# Altium PCB LCD Ohmmeter.PcbDoc
Units mil, origin at the board's own origin, x right, y up, seen from the top; angles counter-clockwise.
Board outline 6000 x 4000 mil, 2 copper layers (Top Layer, Bottom Layer); 10 components, 13 nets, 78 pads, 0 vias.
Unrouted connection lines stored in the file: 31.
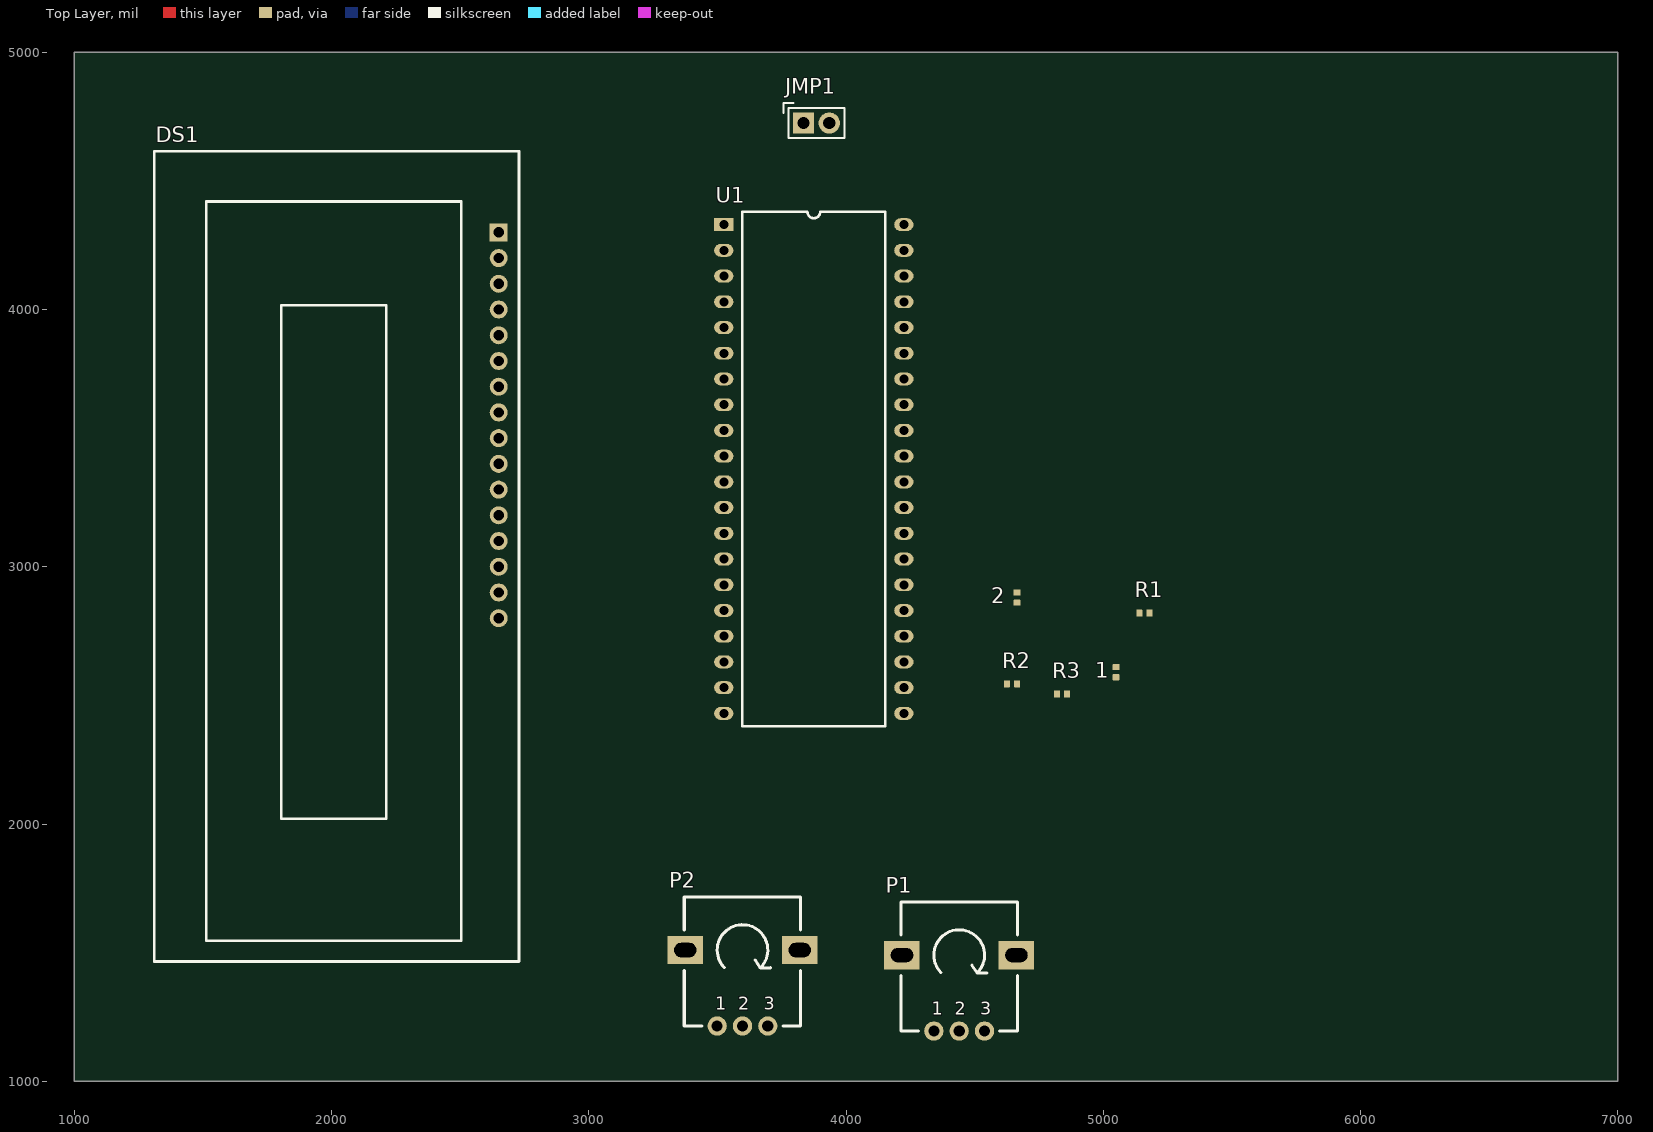
[diagram p0: Top Layer view]
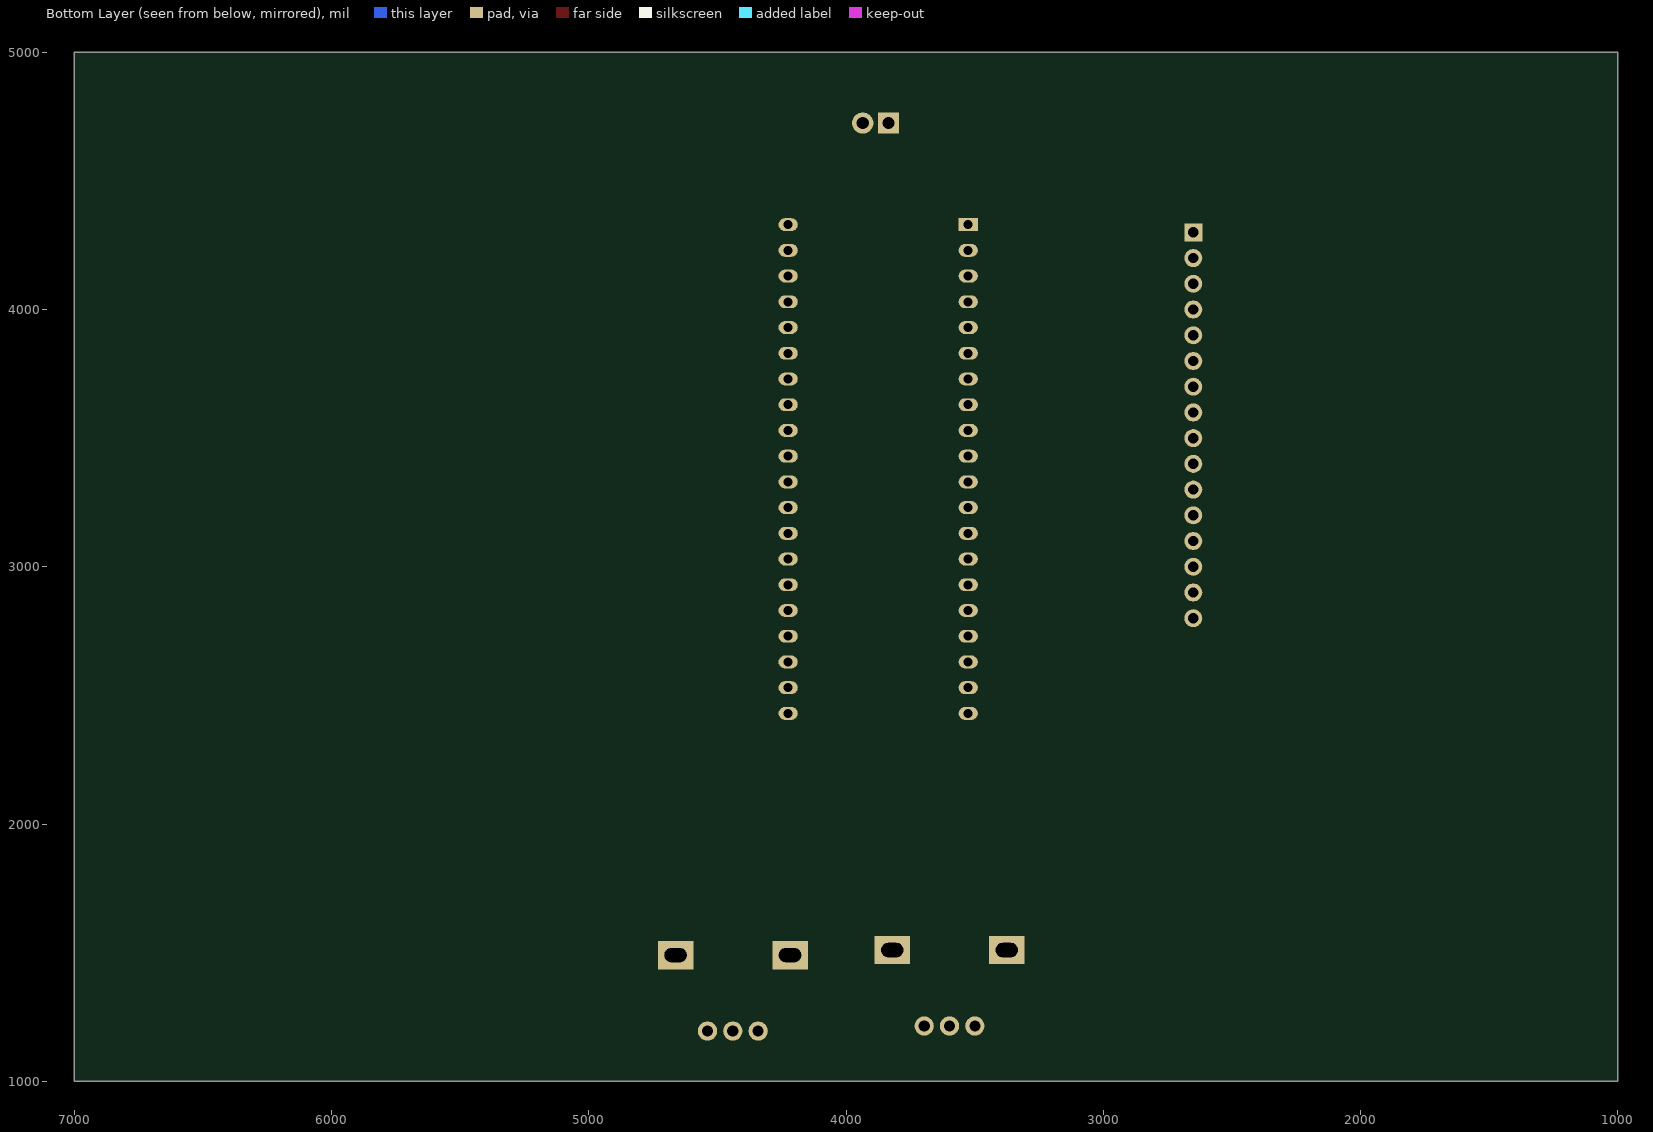
[diagram p1: Bottom Layer view, seen from below]

## Layer stack, top to bottom
Top Solder: solder mask 0.4, Solder Resist, Dk 3.5
Top Layer: signal copper 1.4
Dielectric 1: dielectric 12.6, FR-4, Dk 4.8
Bottom Layer: signal copper 1.4
Bottom Solder: solder mask 0.4, Solder Resist, Dk 3.5

## Board outline
1000,1000 7000,1000 7000,5000 1000,5000

## Design rules (kind name [scope] priority, off if disabled: settings)
Clearance [All] p1: gap=10 ignorepadtopadclearanceinfootprint=FALSE
PolygonConnect [All] p1: connectstyle=Relief reliefconductorwidth=10 reliefentries=4 polygonreliefangle="90 Angle" airgapwidth=10
RoutingVias [All] p1: holewidth=28 width=50 viastyle="Through Hole" minholewidth=28 minwidth=50 maxholewidth=28 maxwidth=50
SolderMaskExpansion [All] p1: expansion=4 istentingtop=FALSE
SupplyNets "Schematic Supply Nets" [InNet('GND')] p1: voltage=0.000
Width [All] p1: maxlimit=10 minlimit=10 preferedwidth=10
30 further rules are at their usual default settings.

## Components (designator, comment, footprint, x,y, rotation, side; value= is the part's Value field where it differs from the comment)
1 "C0402" CAP_0402 5050,2590.31 r90 top
2 "C0402" CAP_0402 4665,2880 r90 top
DS1 "LCD 44780" "OLED 16x2" 2650,4300 r270 top
JMP1 "Jumper" JMP2_TH 3885,4725 r0 top
P1 "10k" RK09L1140A5L 4440,1195 r0 top
P2 "10k" RK09L1140A5L 3597.56,1214.72 r0 top
R1 "220R" RES_0402 5160.31,2820 r0 top
R2 "37K" RES_0402 4645.31,2545 r0 top
R3 "Rx" RES_0402 4840,2505.31 r0 top
U1 "Raspberry Pi Pico" "Raspberry Pi Pico" 3525,4330 r0 top

## Footprints (in the part's own frame and the unit in brackets; to place one, negate y for a bottom-side part, rotate by r counter-clockwise, add the part's x,y. Pads: shape width x height; smd on the part's side, far side on the other; paste and mask are expansions set on the pad)
CAP_0402 [mm]
  rrect25% 0.6x0.7 smd: 1(-0.5,0) 2(0.5,0)
  body extent -0.5,-0.26 0.5,0.26, height 0.37
JMP2_TH [mm]
  rect 2.1x2.1 hole 1.2: 1(-1.27,0)
  round 2.1 hole 1.2: 2(1.27,0)
  silkscreen extent -3.25,-1.5 2.75,2
"OLED 16x2" [mil]
  rect 70x70 hole 40: 1(0,0)
  round 70 hole 40: 2(100,0) 3(200,0) 4(300,0) 5(400,0) 6(500,0) 7(600,0) 8(700,0) 9(800,0) 10(900,0) 11(1000,0) 12(1100,0) 13(1200,0) 14(1300,0) 15(1400,0) 16(1500,0)
  silkscreen extent -315,-1339 2835,79
"Raspberry Pi Pico" [mil]
  rect 75x50 hole 35: 1(0,0)
  oval 75x50 hole 35: 2(0,-100) 3(0,-200) 4(0,-300) 5(0,-400) 6(0,-500) 7(0,-600) 8(0,-700) 9(0,-800) 10(0,-900) 11(0,-1000) 12(0,-1100) 13(0,-1200) 14(0,-1300) 15(0,-1400) 16(0,-1500) 17(0,-1600) 18(0,-1700) 19(0,-1800) 20(0,-1900) 21(700,-1900) 22(700,-1800) 23(700,-1700) 24(700,-1600) 25(700,-1500) 26(700,-1400) 27(700,-1300) 28(700,-1200) 29(700,-1100) 30(700,-1000) 31(700,-900) 32(700,-800) 33(700,-700) 34(700,-600) 35(700,-500) 36(700,-400) 37(700,-300) 38(700,-200) 39(700,-100) 40(700,0)
  silkscreen extent 72,-1950 628,50
RES_0402 [mm]
  rrect25% 0.6x0.7 smd: 1(-0.5,0) 2(0.5,0)
  body extent -0.5,-0.25 0.5,0.25, height 0.3
RK09L1140A5L [mm]
  round 1.9 hole 1.1: 1(-2.5,0) 2(0,0) 3(2.5,0)
  rect 3.5x2.8 hole 1.4 slot 2.2 at 0 deg: MH(-5.65,7.5) MH(5.65,7.5)
  silkscreen extent -5.75,0 5.75,12.75, body extent -6.05,-0.15 6.05,12.35, height 25.01

## Part data
1 2: library part CAP_0402, "Capacitor SMD 0402"
JMP1: library part JMP2_TH, "Jumper 2 Pins Through-Hole DO NOT PLACE"
P1 P2: library part RK09L1140A5L, "Potentiometer Vertical 10k Linear Taper (1B) THT PCB-Mount D-Type 6mm Shaft", Manufacturer="Alps Alpine", Manufacturer Part Number=RK09L1140A5L
R1 R2 R3: library part RES_0402, "Resistor SMD 0402"

## Nets (pads, with @x,y where several pads share a name; then routed paths per layer and width w, separated by ;. In a path a pad name is that pad's centre, name@x,y a point inside that pad or via, vN(x,y) a via of type N, cw(c..) or ccw(c..) an arc to the next point about the centre after c; other vN are vias at no path point)
+3V3: 1.1 P2.3 R2.2 U1.31 U1.35
+5V: DS1.2 R1.2 U1.40
A+: DS1.15 P1.2
ADC_VX: 2.1 R2.1 R3.2 U1.34
D4: DS1.11 U1.14
D5: DS1.12 U1.15
D6: DS1.13 U1.16
D7: DS1.14 U1.17
EN: DS1.6 U1.9
GND: 1.2 2.2 DS1.1 DS1.5 DS1.7 DS1.8 DS1.9 DS1.10 DS1.16 P1.1 P2.1 R3.1 U1.37 U1.38
NetP1_3: P1.3 R1.1
RS: DS1.4 U1.7
VO: DS1.3 P2.2
pads on no net: JMP1.1 JMP1.2 P1.MH P2.MH U1.1 U1.2 U1.3 U1.4 U1.5 U1.6 U1.8 U1.10 U1.11 U1.12 U1.13 U1.18 U1.19 U1.20 U1.21 U1.22 U1.23 U1.24 U1.25 U1.26 U1.27 U1.28 U1.29 U1.30 U1.32 U1.33 U1.36 U1.39

## Text inside footprints (layer, text, board x,y; h text height)
P1: Top Overlay "1" at 4333.38,1258.98 h49.21; Top Overlay "2" at 4423.6,1258.98 h49.21; Top Overlay "3" at 4522.03,1258.98 h49.21; Mechanical 13 "1" at 4335.02,1263.9 h39.37; Mechanical 13 "2" at 4426.88,1263.9 h39.37; Mechanical 13 "3" at 4525.31,1263.9 h39.37
P2: Top Overlay "1" at 3490.93,1278.71 h49.21; Top Overlay "2" at 3581.16,1278.71 h49.21; Top Overlay "3" at 3679.59,1278.71 h49.21; Mechanical 13 "1" at 3492.57,1283.63 h39.37; Mechanical 13 "2" at 3584.44,1283.63 h39.37; Mechanical 13 "3" at 3682.87,1283.63 h39.37